# Altium PCB PCB2.PcbDoc
Units mm, origin at the board's own origin, x right, y up, seen from the top; angles counter-clockwise.
Board outline 73.88 x 31.29 mm, 2 copper layers (Top Layer, Bottom Layer); 48 components, 51 nets, 180 pads, 175 vias.
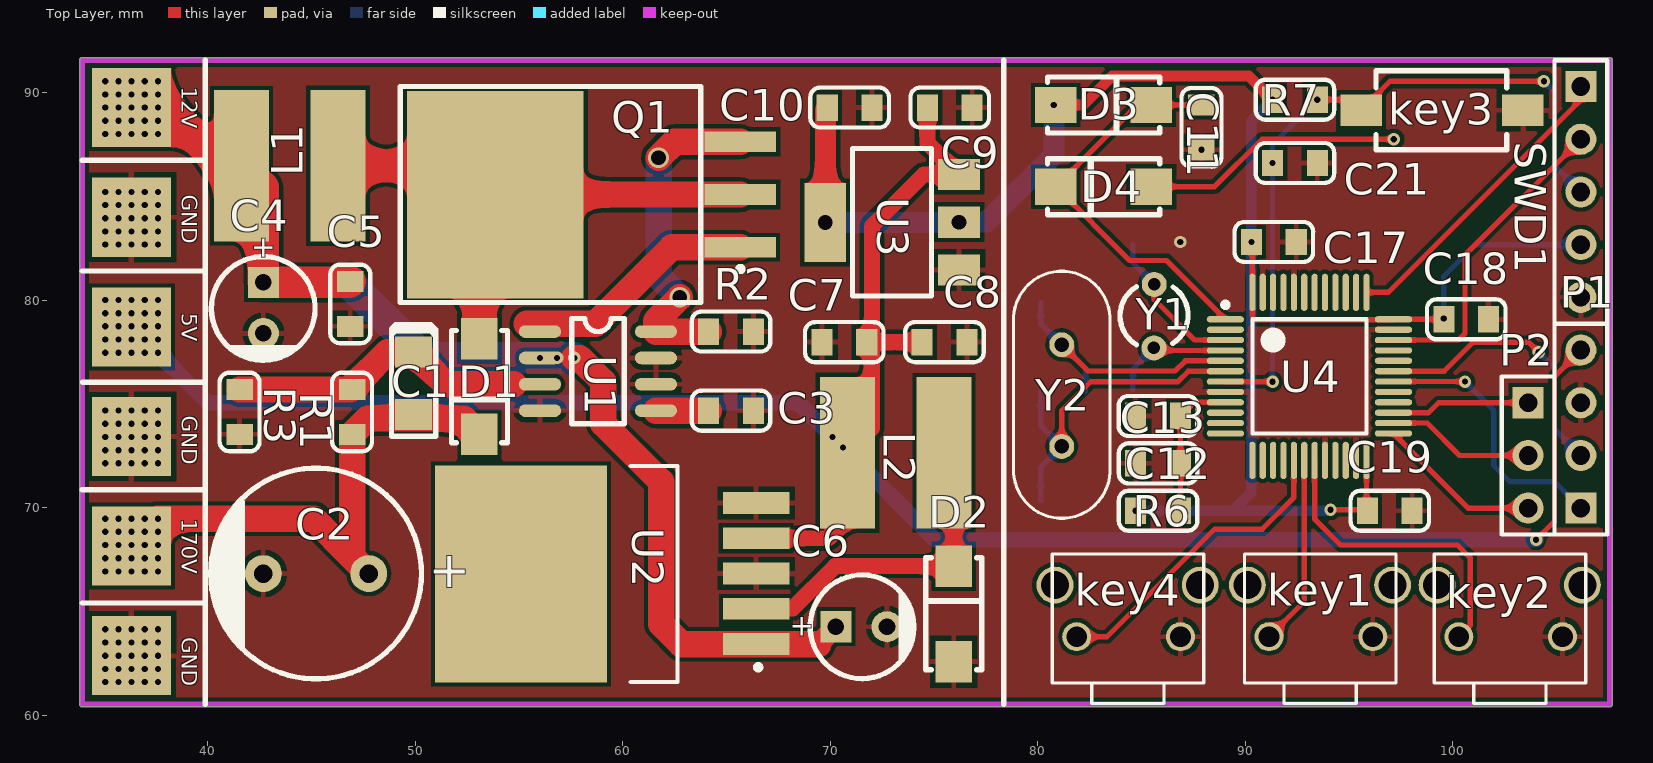
[diagram p0: Top Layer view]
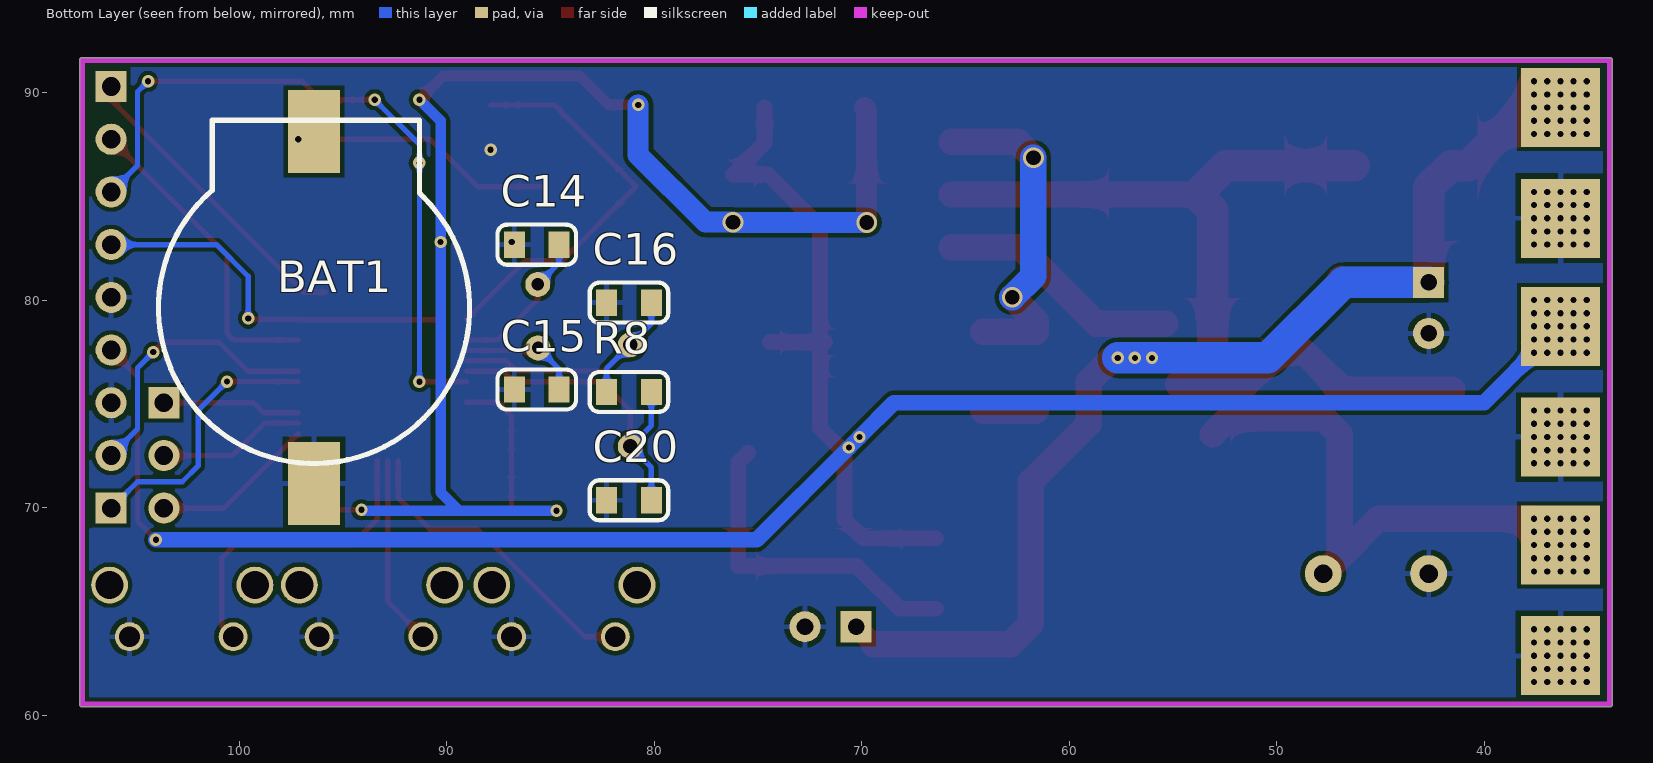
[diagram p1: Bottom Layer view, seen from below]
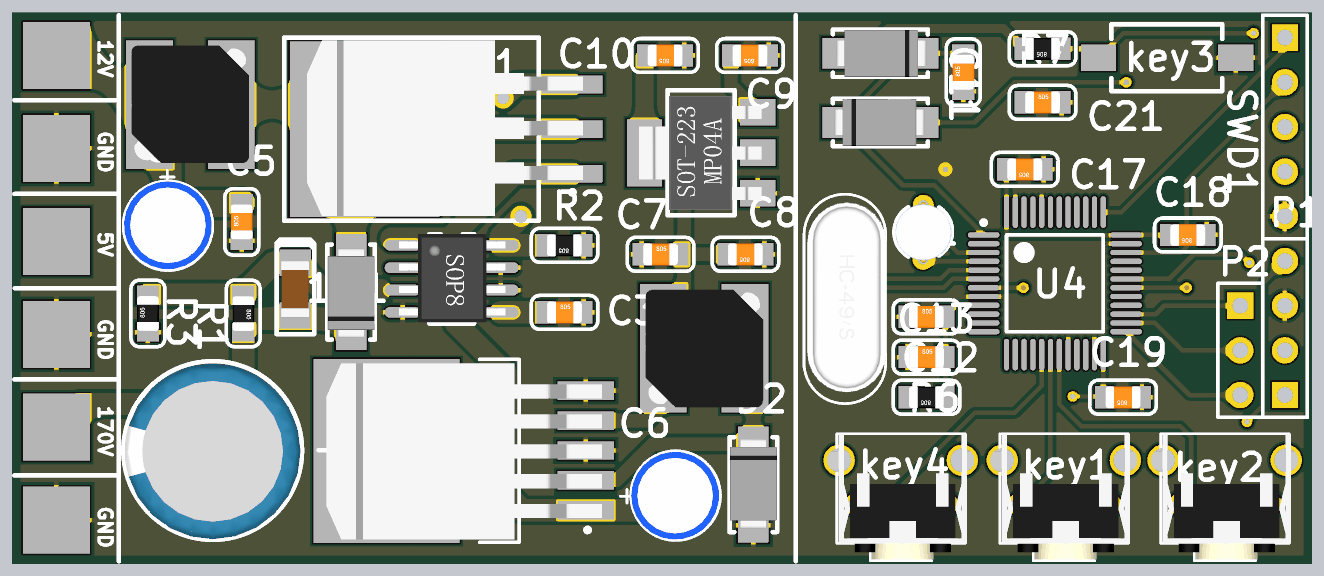
[diagram p2: 3D render of the assembled board from above, using the file's embedded part models]
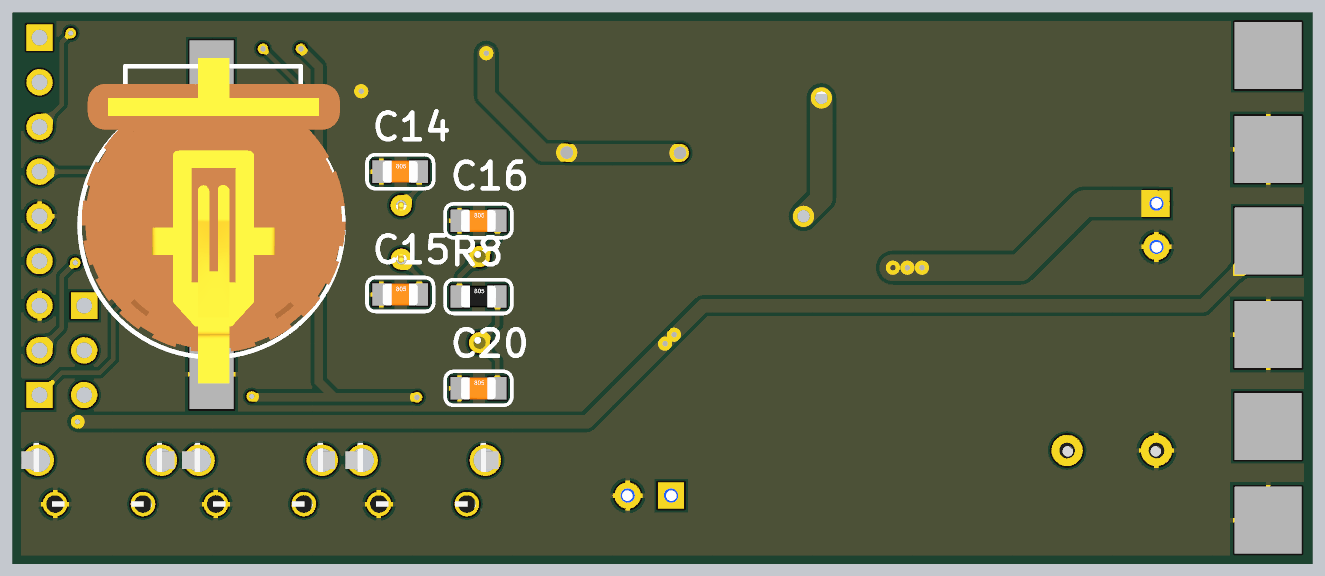
[diagram p3: 3D render of the assembled board from below, using the file's embedded part models]

## Layer stack, top to bottom
Top Solder: solder mask 0.0102, Solder Resist, Dk 3.5
Top Layer: signal copper 0.0356
Dielectric 1: dielectric 0.32, FR-4, Dk 4.8
Bottom Layer: signal copper 0.0356
Bottom Solder: solder mask 0.0102, Solder Resist, Dk 3.5

## Board outline
33.814,60.528 33.814,70.866 cw(c33.941,70.866) 33.814,70.866 33.814,86.741 33.814,91.567 cw(c33.941,91.567) 33.943,91.694 39.879,91.694 ccw(c39.878,91.567) 39.877,91.694 39.879,91.694 78.358,91.694 cw(c78.359,91.567) 78.36,91.694 107.569,91.694 cw(c107.569,91.567) 107.696,91.567 107.696,60.528 cw(c107.569,60.528) 107.569,60.401 33.941,60.401 cw(c33.941,60.528)

## Design rules (kind name [scope] priority, off if disabled: settings)
Clearance [All] p1: gap=0.203 ignorepadtopadclearanceinfootprint=FALSE
PolygonConnect [All] p1: connectstyle=Relief reliefconductorwidth=0.254 reliefentries=4 polygonreliefangle="90 Angle" airgapwidth=0.254
RoutingVias [All] p1: holewidth=0.711 width=1.27 viastyle="Through Hole" minholewidth=0.711 minwidth=1.27 maxholewidth=0.711 maxwidth=1.27
SolderMaskExpansion [All] p1: expansion=0.102
Width [All] p1: maxlimit=2.54 minlimit=0.254 preferedwidth=0.254
30 further rules are at their usual default settings.

## Components (designator, comment, footprint, x,y, rotation, side; value= is the part's Value field where it differs from the comment)
BAT1 "BATTERY" CR1220 96.393,79.629 r90 bottom
C1 "Cap" 1206C 49.911,77.47 r270 top value=101
C2 "Cap2" C10x16 47.752,66.798 r0 top value=10uF
C3 "Cap" 0805-0c 64.135,74.676 r0 top value=104
C4 "Cap2" C5X8 42.672,79.629 r270 top value=100uF
C5 "Cap" 0805-0c 46.863,78.74 r90 top value=104
C6 "Cap2" C5X8 71.501,64.262 r0 top value=100uF
C7 "Cap" 0805-0c 69.596,77.978 r0 top value=10uF
C8 "Cap" 0805-0c 76.581,77.978 r180 top value=104
C9 "Cap" 0805-0c 76.835,89.281 r180 top value=104
C10 "Cap" 0805-0c 72.009,89.281 r180 top value=10uF
C11 "104" 0805-0c 87.884,87.249 r90 top
C12 "104" 0805-0c 84.717,72.136 r0 top
C13 "106" 0805-0c 84.709,74.422 r0 top
C14 "22" 0805-0c 86.741,82.677 r180 bottom
C15 "22" 0805-0c 86.741,75.692 r180 bottom
C16 "22" 0805-0c 82.296,79.883 r180 bottom
C17 "104" 0805-0c 92.456,82.804 r180 top
C18 "104" 0805-0c 101.727,79.077 r180 top
C19 "104" 0805-0c 98.044,69.85 r180 top
C20 "22" 0805-0c 82.296,70.358 r180 bottom
C21 "104" 0805-0c 91.313,86.614 r0 top
D1 "Diode" DO-214 53.086,78.133 r270 top
D2 "Diode" DO-214 75.946,62.583 r90 top
D3 "1N4148" DO-214 80.871,89.408 r0 top
D4 "1N4148" DO-214 85.471,85.471 r180 top
key1 "KEY_1" KEY-DIP4W 93.599,65.024 r270 top
key2 "KEY_1" KEY-DIP4W 102.743,65.024 r270 top
key3 "KEY_1" KEY-SMD1 95.578,89.154 r0 top
key4 "KEY_1" KEY-DIP4W 84.328,65.024 r270 top
L1 "Inductor" L7X7 43.942,86.487 r0 top value=220mH
L2 "Inductor" L7X7 73.152,72.644 r180 top value=220mH
P1 "UART1" HDR1X4 106.172,69.977 r90 top
P2 "Header 3" HDR1X3 103.632,75.057 r270 top
Q1 "MOSFET-N" TO-263-3 59.436,85.09 r180 top
R1 "Res2" 0805-0r 46.951,75.692 r270 top value=1.8M
R2 "Res2" 0805-0r 66.294,78.486 r180 top value=0.01
R3 "Res2" 0805-0r 41.529,73.533 r90 top value=16K
R6 "10R" 0805-0r 86.876,69.85 r180 top
R7 "10K" 0805-0r 93.472,89.662 r180 top
R8 "1M" 0805-0r 82.296,75.577 r180 bottom
SWD1 "HEADER 5" HDR1X5 106.172,90.297 r270 top
U1 "MAX1771" sop8 56.032,78.511 r0 top
U2 "LM2596" TO263-5 61.214,66.421 r0 top
U3 "AMS1117-3.3" SOT-223 72.898,83.693 r90 top
U4 "STM32F103C8T6" STM-LQFP48_N 93.091,76.327 r0 top
Y1 "32768" XTAL3X8 85.598,79.248 r270 top
Y2 "8MHz" XTAL-49S-DIP 81.153,77.851 r270 top

## Footprints (in the part's own frame and the unit in brackets; to place one, negate y for a bottom-side part, rotate by r counter-clockwise, add the part's x,y. Pads: shape width x height; smd on the part's side, far side on the other; paste and mask are expansions set on the pad)
0805-0c [mil]
  rect 40x50 smd: 1(0,0) 2(85,0)
  silkscreen extent -32,-38 117,38, body extent 3,-25 82,25, height 30
0805-0r [mil]
  rect 40x50 smd: 1(0,0) 2(85,0)
  silkscreen extent -32,-38 117,38, body extent 3,-25 82,25, height 30
1206C [mil]
  rect 59.06x70 smd: 1(-1,0) 2(117.11,0)
  silkscreen extent -53,-42 159,42, body extent -5,-32 121,31, height 37
C5X8 [mm] "RB.1/.2"
  rect 1.5x1.5 hole 0.8: 1(-1.231,0)
  round 1.5 hole 0.8: 2(1.231,0)
  silkscreen extent -2.47,-2.5 2.53,2.5, body extent -2.5,-2.5 2.5,2.49, height 8.13
C10x16 [mil] "RB.2/.4"
  round 70 hole 35: 1(0,1) 2(-200,1)
  silkscreen extent -300,-199 100,201, body extent -297,-198 97,196, height 709
CR1220 [mm]
  rect 4x2.5 smd: 1(-8.458,0) 2(8.509,0)
  silkscreen extent -7.5,-7.5 9.04,7.5, body extent -9,-7.62 9.5,7.38, height 4.94
DO-214 [mm]
  rect 2x1.75 smd: 1(0,0) 2(4.6,0)
  silkscreen extent -0.4,-1.35 5,1.35, body extent -0.2,-1.34 4.91,1.33, height 2.12
HDR1X3 [mm] "Connector; Header; 3 Position"
  rect 1.5x1.5 hole 0.9: 1(0,0)
  round 1.5 hole 0.9: 2(2.54,0) 3(5.08,0)
  silkscreen extent -1.27,-1.27 6.35,1.27
HDR1X4 [mm] "Connector; Header; 4 Position"
  rect 1.5x1.5 hole 0.9: 1(0,0)
  round 1.5 hole 0.9: 2(2.54,0) 3(5.08,0) 4(7.62,0)
  silkscreen extent -1.27,-1.27 8.89,1.27
HDR1X5 [mm] "Connector; Header; 5 Position"
  rect 1.5x1.5 hole 0.9: 1(0,0)
  round 1.5 hole 0.9: 2(2.54,0) 3(5.08,0) 4(7.62,0) 5(10.16,0)
  silkscreen extent -1.27,-1.27 11.43,1.27
KEY-DIP4W [mil]
  round 55 hole 39.37: 1(49,100.3) 2(49,-96.56)
  round 70 hole 53.15: 3(-49,-137.8) 4(-49,137.8)
  silkscreen extent -108,-143 176,144, body extent -108,-167 173,176, height 138
KEY-SMD1 [mm]
  rect 2x1.5 smd: 1(0,0) 2(7.8,0)
  silkscreen extent 0.73,-1.9 7.03,1.9, body extent -0.06,-1.94 7.83,1.91, height 2.5
L7X7 [mm] "POWER INDUCTOR 5uH"
  rect 2.65x7.3 smd: 1(-2.325,0) 2(2.325,0)
  body extent -3.36,-3.33 3.34,3.37, height 2.9
sop8 [mil]
  oval 80x24 smd: 1(-1,-1) 2(-1,-51) 3(-1,-101) 4(-1,-151) 5(219,-151) 6(219,-101) 7(219,-51) 8(219,-1)
  silkscreen extent 59,-176 159,24, body extent -9,-174 229,24, height 63
SOT-223 [mil]
  rect 59x79 smd: 1(-88,-130) 2(2.55,-130) 3(93.1,-130)
  rect 150x79 smd: 2(1.88,123.54)
  silkscreen extent -137,-78 143,72, body extent -126,-139 130,135, height 67
STM-LQFP48_N [mm] "QFP, 48-Leads, Body 7x7mm, Pitch 0.5mm, IPC Medium Density"
  oval 1.8x0.3 smd: 1(-4.05,2.75) 2(-4.05,2.25) 3(-4.05,1.75) 4(-4.05,1.25) 5(-4.05,0.75) 6(-4.05,0.25) 7(-4.05,-0.25) 8(-4.05,-0.75) 9(-4.05,-1.25) 10(-4.05,-1.75) 11(-4.05,-2.25) 12(-4.05,-2.75) 25(4.05,-2.75) 26(4.05,-2.25) 27(4.05,-1.75) 28(4.05,-1.25) 29(4.05,-0.75) 30(4.05,-0.25) 31(4.05,0.25) 32(4.05,0.75) 33(4.05,1.25) 34(4.05,1.75) 35(4.05,2.25) 36(4.05,2.75)
  oval 0.3x1.8 smd: 13(-2.75,-4.05) 14(-2.25,-4.05) 15(-1.75,-4.05) 16(-1.25,-4.05) 17(-0.75,-4.05) 18(-0.25,-4.05) 19(0.25,-4.05) 20(0.75,-4.05) 21(1.25,-4.05) 22(1.75,-4.05) 23(2.25,-4.05) 24(2.75,-4.05) 37(2.75,4.05) 38(2.25,4.05) 39(1.75,4.05) 40(1.25,4.05) 41(0.75,4.05) 42(0.25,4.05) 43(-0.25,4.05) 44(-0.75,4.05) 45(-1.25,4.05) 46(-1.75,4.05) 47(-2.25,4.05) 48(-2.75,4.05)
  silkscreen extent -4.17,-2.75 2.75,3.57, body extent -3.5,-3.5 3.5,3.5, height 1.6
TO263-5 [mm]
  rect 3.2x1.05 smd: 1(5.207,-2.997) 2(5.207,-1.297) 3(5.207,0.403) 4(5.207,2.103) 5(5.207,3.803)
  rect 8.3x10.45 smd: 6(-6.117,0.381)
  silkscreen extent -0.83,-4.82 5.43,5.58, body extent -9.54,-4.64 6.13,5.36, height 4.78
TO-263-3 [mm] "D2PAK936"
  rect 3.45x1 smd: 1(-6.225,2.54) 2(-6.225,0) 3(-6.225,-2.54)
  rect 8.5x10 smd: 2(5.588,0)
  silkscreen extent -6.35,-5.21 10.16,5.21, body extent -6.82,-5.05 8.85,4.95, height 4.88
XTAL3X8 [mm]
  round 1.2 hole 0.6: 1(-1.509,0.013) 2(1.55,0)
  silkscreen extent -1.4,-1.63 1.4,1.64, body extent -1.71,-1.59 1.74,1.61, height 9.28
XTAL-49S-DIP [mm]
  round 1.2 hole 0.7: 1(0,0) 2(4.9,0)
  silkscreen extent -3.54,-2.32 8.36,2.32, body extent -3.08,-2.14 7.72,2.36, height 3.5

## Part data
C1 C2 C3 C4 C5 C6 C7 C8 C9 C10: "Capacitor", Publisher="Altium Limited"
  C1 C3 C5 C7 C8 C9 C10: LatestRevisionDate=17-Jul-2002, LatestRevisionNote="Re-released for DXP Platform.", PackageDescription="Radial Cap, Thru-Hole; 2 Leads; 0.3 in Pin Spacing", PackageReference=RAD-0.3, Published=8-Jun-2000
  C2 C4 C6: PackageDescription="Capacitor; 2 Leads", PackageReference=CAPR5-4X5, Published=23-Sep-2002
C11 C12 C13 C16 C17 C18 C19 C20 C21: library part C
C14 C15: library part 普通电容, "Capacitor"
D1 D2: "Default Diode", Code_JEDEC=DO-214-AB, LatestRevisionDate=17-Jul-2002, LatestRevisionNote="Re-released for DXP Platform.", PackageDescription="DO-214-AB/SMC; 2 C-Bend Leads; Body 7.9 x 5.9 mm, inc. leads (LxW)", PackageReference=SMC, PackageVersion=Sep-1996, Published=8-Jun-2000, Publisher="Altium Limited"
D3 D4: library part DIODE1
P1: library part "Header 4", "Header, 4-Pin", LatestRevisionDate=17-Jul-2002, LatestRevisionNote="Re-released for DXP Platform.", Publisher="Altium Limited"
P2: "Header, 3-Pin", LatestRevisionDate=17-Jul-2002, LatestRevisionNote="Re-released for DXP Platform.", Publisher="Altium Limited"
Q1: "N-Channel MOSFET", LatestRevisionDate=17-Jul-2002, LatestRevisionNote="Re-released for DXP Platform.", PackageDescription="TO, Flat Index; 3 In-Line, Axial Leads; Body Dia. 4.6mm; Lead Dia. 0.5 mm (max)", PackageReference=E3, PackageVersion=1995/1996, Published=8-Jun-2000, Publisher="Altium Limited"
R1 R2 R3: "Resistor", LatestRevisionDate=17-Jul-2002, LatestRevisionNote="Re-released for DXP Platform.", PackageDescription="Axial Device, Thru-Hole; 2 Leads; 0.4 in Pin Spacing", PackageReference=AXIAL-0.4, Published=8-Jun-2000, Publisher="Altium Limited"
R6 R7 R8: library part R
U1 U2: library part Component_1
U3: library part AMS1117
U4: "ARM Cortex-M3 32-bit MCU, 64 KB Flash, 20 KB Internal RAM, 37 I/Os, 48-pin LQFP, -40 to 85 degC, Tray", I/Os (High Current)=37, Operating Frequency(F) (Processor speed) (MHz)=72, Supplier Part Number 1=497-6063-ND, Supply Voltage(Vcc) min (V)=2, A/D Converter="2x12-bit (10 Channel)", ComponentLink1Description="Manufacturer URL", ComponentLink1URL=http://www.st.com/web/en/home.html, ComponentLink2Description=Datasheet, ComponentLink2URL=http://www.st.com/st-web-ui/static/active/en/resource/technical/document/datasheet/CD00161566.pdf, ComponentLink3Description="Package Specification", ComponentLink3URL=http://www.st.com/st-web-ui/static/active/en/resource/technical/document/datasheet/DM00058181.pdf, Core="ARM Cortex-M3", DatasheetVersion="Rev. 16", FLASH Size (Prog) (kB)=64, Internal RAM Size (kB)=20, Mounting Technology="Surface Mount", PackageDescription="48-Pin Low Profile Quad Flat Package, 7 x 7 mm Body, 0.5 mm Pitch", PackageReference=LQFP48, PackageVersion="Rev. 6, 06/2013", Packing=Tray, PartNumber=STM32F103C8T6, Supplier 1=Digi-Key, Supplier 2=Farnell, Supplier 3=Newark, Supplier 4=Newark, Supplier 5=Mouser, Supplier Part Number 2=1447637, Supplier Part Number 3=59M2182, Supplier Part Number 4=57P1222, Supplier Part Number 5=511-STM32F103C8T6
Y1: library part XTAL
Y2: library part XTAL, "Crystal Oscillator", LatestRevisionDate=17-Jul-2002, LatestRevisionNote="Re-released for DXP Platform.", Published=8-Jun-2000, Publisher="Altium Limited"
L1 L2: Code_IEC=1005, Code_JEITA=0402, LatestRevisionDate=29-May-2009, LatestRevisionNote="IPC-7351 Footprint Added.", PackageDescription="Chip Inductor", PackageReference=0402-A, Published=8-Jun-2000, Publisher="Altium Limited"

## Free pads (board coordinates)
  rect 3.81x3.81 smd: 1(36.322,89.281) 19(36.322,62.865) 20(36.322,68.148) 21(36.322,73.431) 22(36.322,78.715) 23(36.322,83.998)
  rect 3.81x3.81 smd far side: 26(36.322,89.281) 27(36.322,83.947) 28(36.322,78.74) 29(36.322,73.406) 30(36.322,68.199) 31(36.322,62.865)

## Via types
v1: diameter 0.6, hole 0.3, Top Layer to Bottom Layer, 171 vias
v2: diameter 1, hole 0.711, Top Layer to Bottom Layer, 4 vias

## Nets (pads, with @x,y where several pads share a name; then routed paths per layer and width w, separated by ;. In a path a pad name is that pad's centre, name@x,y a point inside that pad or via, vN(x,y) a via of type N, cw(c..) or ccw(c..) an arc to the next point about the centre after c; other vN are vias at no path point)
+3.3: C10.2 C17.2 C18.2 C19.2 D3.1 R6.2 R7.2 SWD1.4 U3.2 U4.24 U4.36 U4.48 | length 88.3
  Top Layer w0.254: v1(90.297,82.804) 90.341,82.76 U4.48 90.341,79.204 90.488,79.057 97.121,79.057 U4.36 C18.2 ; v1(94.107,69.894) C19.2@95.841,69.894 ; U4.24 C19.2@95.841,69.894 ; C19.2 C19.2@95.841,69.894
  Top Layer w0.508: v1(80.772,89.408) D3.1 82.191,89.408 83.588,90.805 90.17,90.805 v1(91.313,89.662)
  Top Layer w1.016: v2(69.76,83.741) 69.76,89.191 C10.2
  Bottom Layer w0.254: v1(99.568,79.121) 99.568,81.153 101.092,82.677 SWD1.4
  Bottom Layer w0.508: v1(84.709,69.85) 89.408,69.85 ; v1(91.313,89.662) 90.297,88.646 v1(90.297,82.804) 90.297,70.739 89.408,69.85 ; v1(94.107,69.894) 94.063,69.85 89.408,69.85
  Bottom Layer w1.016: v2(69.76,83.741) 76.183,83.741 v2(76.2,83.758) 77.535,83.758 80.772,86.995 v1(80.772,89.408)
+5: C7.2 C8.2 C9.2 L2.2 P1.4 pad.22 pad.28 U2.4 U3.3 | length 111.3
  Top Layer w0.254: v1(104.013,68.453) 104.902,69.342 104.902,76.327 P1.4
  Top Layer w0.762: U2.4 69.921,68.524 70.827,69.43 L2.2 ; L2.2@70.847,72.663 72.009,73.826 C7.2@72.009,77.978 ; C7.2 C7.2@72.009,77.978 ; C8.2 C7.2@72.009,77.978 ; C9.2 74.676,87.582 U3.3 74.501,86.058 72.009,83.566 C7.2@72.009,77.978
  Bottom Layer w0.762: v1(37.592,77.47) 40.005,75.057 68.453,75.057 v1(70.104,73.406) v1(70.612,72.898) 75.057,68.453 v1(104.013,68.453)
  other v1: 35.052,77.47 35.687,77.47 36.322,77.47 36.957,77.47 35.052,78.105 35.687,78.105 36.322,78.105 36.957,78.105 37.592,78.105 35.052,78.74 35.687,78.74 36.322,78.74 36.957,78.74 37.592,78.74 35.052,79.375 35.687,79.375 36.322,79.375 36.957,79.375 37.592,79.375 35.052,80.01 35.687,80.01 36.322,80.01 36.957,80.01 37.592,80.01
+12: C4.1 C5.2 C6.1 L1.1 pad.1 pad.26 U1.2 U2.1 | length 57.1
  Top Layer w1.016: 69.432,63.424 C6.1
  Top Layer w1.27: v1(57.658,77.216) 57.912,77.216 59.055,76.073 59.055,74.041 61.849,71.247 61.849,64.389 62.814,63.424 U2.1 69.432,63.424
  Top Layer w1.524: v1(36.322,89.281) 37.973,89.281 40.767,86.487 L1.1 42.672,85.432 C4.1 46.824,80.86 C5.2
  Bottom Layer w1.524: C4.1 46.775,80.86 50.419,77.216 v1(56.007,77.216) v1(57.658,77.216)
  other v1: 56.832,77.216 35.052,88.011 35.687,88.011 36.322,88.011 36.957,88.011 37.592,88.011 35.052,88.646 35.687,88.646 36.322,88.646 36.957,88.646 37.592,88.646 35.052,89.281 35.687,89.281 36.957,89.281 37.592,89.281 35.052,89.916 35.687,89.916 36.322,89.916 36.957,89.916 37.592,89.916 35.052,90.551 35.687,90.551 36.322,90.551 36.957,90.551 37.592,90.551
+170: C1.2 C2.1 D1.2 pad.20 pad.30 R1.2 | length 23.9
  Top Layer w1.27: v1(37.592,69.469) 45.107,69.469 46.951,67.625 ; C2.1 46.951,67.625 ; D1.2 52.324,74.295 47.713,74.295 R1.2 46.951,67.625
  other v1: 35.052,66.929 35.687,66.929 36.322,66.929 36.957,66.929 37.592,66.929 35.052,67.564 35.687,67.564 36.322,67.564 36.957,67.564 37.592,67.564 35.052,68.199 35.687,68.199 36.322,68.199 36.957,68.199 37.592,68.199 35.052,68.834 35.687,68.834 36.322,68.834 36.957,68.834 37.592,68.834 35.052,69.469 35.687,69.469 36.322,69.469 36.957,69.469
GND: BAT1.1 C2.2 C3.2 C4.2 C5.1 C6.2 C7.1 C8.1 C9.1 C10.1 C11.1 C12.1 C13.1 C14.1 C15.1 C16.1 C17.1 C18.1 C19.1 C20.1 C21.2 D2.1 key1.1 key2.1 key3.2 key4.1 P1.3 pad.19 pad.21 pad.23 pad.27 pad.29 pad.31 R2.1 R3.1 SWD1.5 U1.4 U1.6 U1.7 U2.3 U2.5 U3.1 U4.8 U4.20 U4.23 U4.35 U4.44 U4.47
  other v1: 35.052,61.595 35.687,61.595 36.322,61.595 36.957,61.595 37.592,61.595 35.052,62.23 35.687,62.23 36.322,62.23 36.957,62.23 37.592,62.23 35.052,62.865 35.687,62.865 36.322,62.865 36.957,62.865 37.592,62.865 35.052,63.5 35.687,63.5 36.322,63.5 36.957,63.5 37.592,63.5 35.052,64.135 35.687,64.135 36.322,64.135 36.957,64.135 37.592,64.135 35.052,72.136 35.687,72.136 36.322,72.136 36.957,72.136 37.592,72.136 35.052,72.771 35.687,72.771 36.322,72.771 36.957,72.771 37.592,72.771 35.052,73.406 35.687,73.406 36.322,73.406 36.957,73.406 37.592,73.406 35.052,74.041 35.687,74.041 36.322,74.041 36.957,74.041 37.592,74.041 35.052,74.676 35.687,74.676 36.322,74.676 36.957,74.676 37.592,74.676 35.052,82.677 35.687,82.677 36.322,82.677 36.957,82.677 37.592,82.677 86.868,82.804 35.052,83.312 35.687,83.312 36.322,83.312 36.957,83.312 37.592,83.312 35.052,83.947 35.687,83.947 36.322,83.947 36.957,83.947 37.592,83.947 35.052,84.582 35.687,84.582 36.322,84.582 36.957,84.582 37.592,84.582 35.052,85.217 35.687,85.217 36.322,85.217 36.957,85.217 37.592,85.217 87.884,87.249
KEY1: key1.2 U4.18 | length 9.2
  Top Layer w0.254: key1.2 92.841,65.474 U4.18
KEY2: key2.2 U4.19 | length 15.1
  Top Layer w0.254: U4.19 93.341,69.445 94.587,68.199 100.223,68.199 100.838,67.584 100.838,64.327 key2.2
KEY3: key4.2 U4.17 | length 15
  Top Layer w0.254: key4.2 83.337,63.779 88.519,68.961 90.812,68.961 92.341,70.49 U4.17
LED0: U4.21
LED1: U4.22
NetBAT1_1: BAT1.2 D4.1 | length 12.6
  Top Layer w0.254: D4.1 88.519,85.471 90.805,87.757 v1(97.155,87.757)
NetC1_1: C1.1 R1.1 R3.2 U1.3 | length 14.6
  Top Layer w1.27: R3.2 46.863,75.692 48.666,77.495 C1.1 51.46,75.946 54.737,75.946
NetC3_1: C3.1 U1.5 | length 2.5
  Top Layer w1.27: U1.5 C3.1
NetC12_2: C12.2 C13.2 R6.1 U4.9 | length 7
  Top Layer w0.254: R6.1 C12.2 86.876,74.414 C13.2 87.523,75.077 U4.9
NetC14_2: C14.2 U4.3 Y1.1 | length 7.3
  Top Layer w0.254: Y1.1 85.611,80.025 87.559,78.077 U4.3
  Bottom Layer w0.254: C14.2 84.582,81.786 Y1.1
NetC15_2: C15.2 U4.4 Y1.2 | length 5.9
  Top Layer w0.254: Y1.2 85.719,77.577 U4.4
  Bottom Layer w0.254: C15.2 84.582,76.682 Y1.2
NetC16_2: C16.2 R8.1 U4.5 Y2.1 | length 13.8
  Top Layer w0.254: Y2.1 82.423,76.581 86.614,76.581 87.11,77.077 U4.5
  Bottom Layer w0.254: C16.2 80.137,78.867 Y2.1 82.296,76.708 R8.1
NetC20_2: C20.2 R8.2 U4.6 Y2.2 | length 16.5
  Top Layer w0.254: Y2.2 81.153,74.676 82.55,76.073 86.753,76.073 87.257,76.577 U4.6
  Bottom Layer w0.254: C20.2 80.137,71.935 Y2.2 80.137,73.967 R8.2
NetD1_1: D1.1 L1.2 Q1.2 | length 27.2
  Top Layer w1.27: Q1.2@53.848,85.09 Q1.2@65.661,85.09
  Top Layer w1.524: L1.2 52.451,86.487 53.848,85.09 53.086,84.328 D1.1
NetD2_2: D2.2 L2.1 U2.2 | length 16
  Top Layer w0.762: U2.2 68.172,65.124 70.231,67.183 D2.2 75.946,72.175 L2.1
NetQ1_2: Q1.1 U1.1 | length 11.8
  Top Layer w1.27: 55.372,78.867 58.674,78.867 62.357,82.55 Q1.1
NetQ1_3: Q1.3 R2.2 U1.8 | length 16.1
  Top Layer w1.27: v2(61.722,86.868) 62.484,87.63 Q1.3 ; v2(62.738,80.137) 61.595,78.994 U1.8 R2.2
  Bottom Layer w1.27: v2(61.722,86.868) 61.722,81.153 v2(62.738,80.137)
PA0: U4.10
PA1: U4.11
PA2: U4.12
PA3: U4.13
PA4: U4.14
PA5: U4.15
PA6: U4.16
PA8: U4.29
PA9: P1.1 U4.30 | length 13.1
  Top Layer w0.254: U4.30 v1(100.588,76.077)
  Bottom Layer w0.254: v1(100.588,76.077) 101.981,74.684 101.981,72.009 102.743,71.247 104.902,71.247 P1.1
PA10: P1.2 U4.31 | length 13.6
  Top Layer w0.254: U4.31 99.584,76.577 100.985,77.978 103.657,77.978 v1(104.14,77.495)
  Bottom Layer w0.254: v1(104.14,77.495) 104.902,76.733 104.902,73.787 P1.2
PA11: U4.32
PA12: U4.33
PA15: U4.38
PB3: U4.39
PB4: U4.40
PB5: U4.41
PB6: U4.42
PB7: U4.43
PB8: U4.45
PB9: U4.46
PB12: P2.3 U4.25 | length 8
  Top Layer w0.254: U4.25 100.741,69.977 P2.3
PB13: P2.2 U4.26 | length 7.1
  Top Layer w0.254: U4.26 98.77,74.077 100.33,72.517 P2.2
PB14: P2.1 U4.27 | length 6.7
  Top Layer w0.254: U4.27 98.834,74.577 99.314,75.057 P2.1
PB15: U4.28
PC13: U4.2
RESET: C21.1 key3.1 R7.1 SWD1.3 U4.7 | length 34.5
  Top Layer w0.254: U4.7 89.045,76.073 v1(91.313,76.073) ; v1(93.472,89.662) 95.07,89.662 key3.1 96.975,90.551 v1(104.394,90.551)
  Bottom Layer w0.254: v1(91.313,76.073) v1(91.313,86.614) 91.313,87.503 v1(93.472,89.662) ; v1(104.394,90.551) 104.902,90.043 104.902,86.487 SWD1.3
SWCLK: SWD1.1 U4.37 | length 14.8
  Top Layer w0.254: U4.37 96.887,80.377 106.172,89.662 SWD1.1
SWDIO: SWD1.2 U4.34 | length 15.3
  Top Layer w0.254: U4.34 100.267,78.077 100.588,78.398 100.588,82.173 SWD1.2
vbat: C11.2 D3.2 D4.2 U4.1 | length 19.5
  Top Layer w0.254: C11.2 D3.2 84.808,89.408 D4.2 84.427,81.915 86.203,81.915 U4.1
pads on no net: key1.3 key1.4 key2.3 key2.4 key4.3 key4.4 U2.6

## Polygon pours and split planes (outlines as drawn)
GND on Bottom Layer "Bottom Layer-GND" (solid, remove dead copper, pour order 8): 110.236,94.869 108.966,93.599 30.734,93.599 30.734,61.214 33.401,58.547 33.909,59.055 109.601,59.055
GND on Top Layer "Top Layer-GND" (solid, remove dead copper, pour order 10): 33.401,95.758 109.474,95.758 108.966,95.25 108.966,57.531 32.385,57.531 31.877,58.039

## Keep-outs
Keep-Out Layer:
  lines w0.254: 33.941,60.528 107.569,60.528 107.569,91.567 33.941,91.567 33.941,60.528

## Silkscreen, mask and mechanical layers (free items; w line width, h text height)
Top Overlay:
  lines w0.254: 33.941,65.405 39.878,65.405 ; 33.941,70.866 39.878,70.866 ; 33.941,81.407 39.878,81.407 ; 33.941,86.741 39.878,86.741 ; 33.967,76.048 39.878,76.048 ; 39.878,60.528 39.878,91.567 ; 78.359,60.528 78.359,91.567
  text "12V" at 38.735,90.297 h0.76 r270
  text "GND" at 38.735,85.09 h0.76 r270
  text "5V" at 38.735,79.375 h0.76 r270
  text "GND" at 38.735,74.422 h0.76 r270
  text "170V" at 38.735,69.469 h0.76 r270
  text "GND" at 38.735,63.754 h0.76 r270

## Text inside footprints (layer, text, board x,y; h text height)
C2: Top Overlay "+" at 50.648,66.163 h1.75
C4: Top Overlay "+" at 42.24,83.097 h1.02 r270
C6: Top Overlay "+" at 68.033,63.83 h1.02